# Altium PCB Driver_motor.PcbDoc
Units mm, origin at the board's own origin, x right, y up, seen from the top; angles counter-clockwise.
Board outline 69.34 x 68.83 mm, 2 copper layers (Top Layer, Bottom Layer); 39 components, 38 nets, 169 pads, 26 vias.
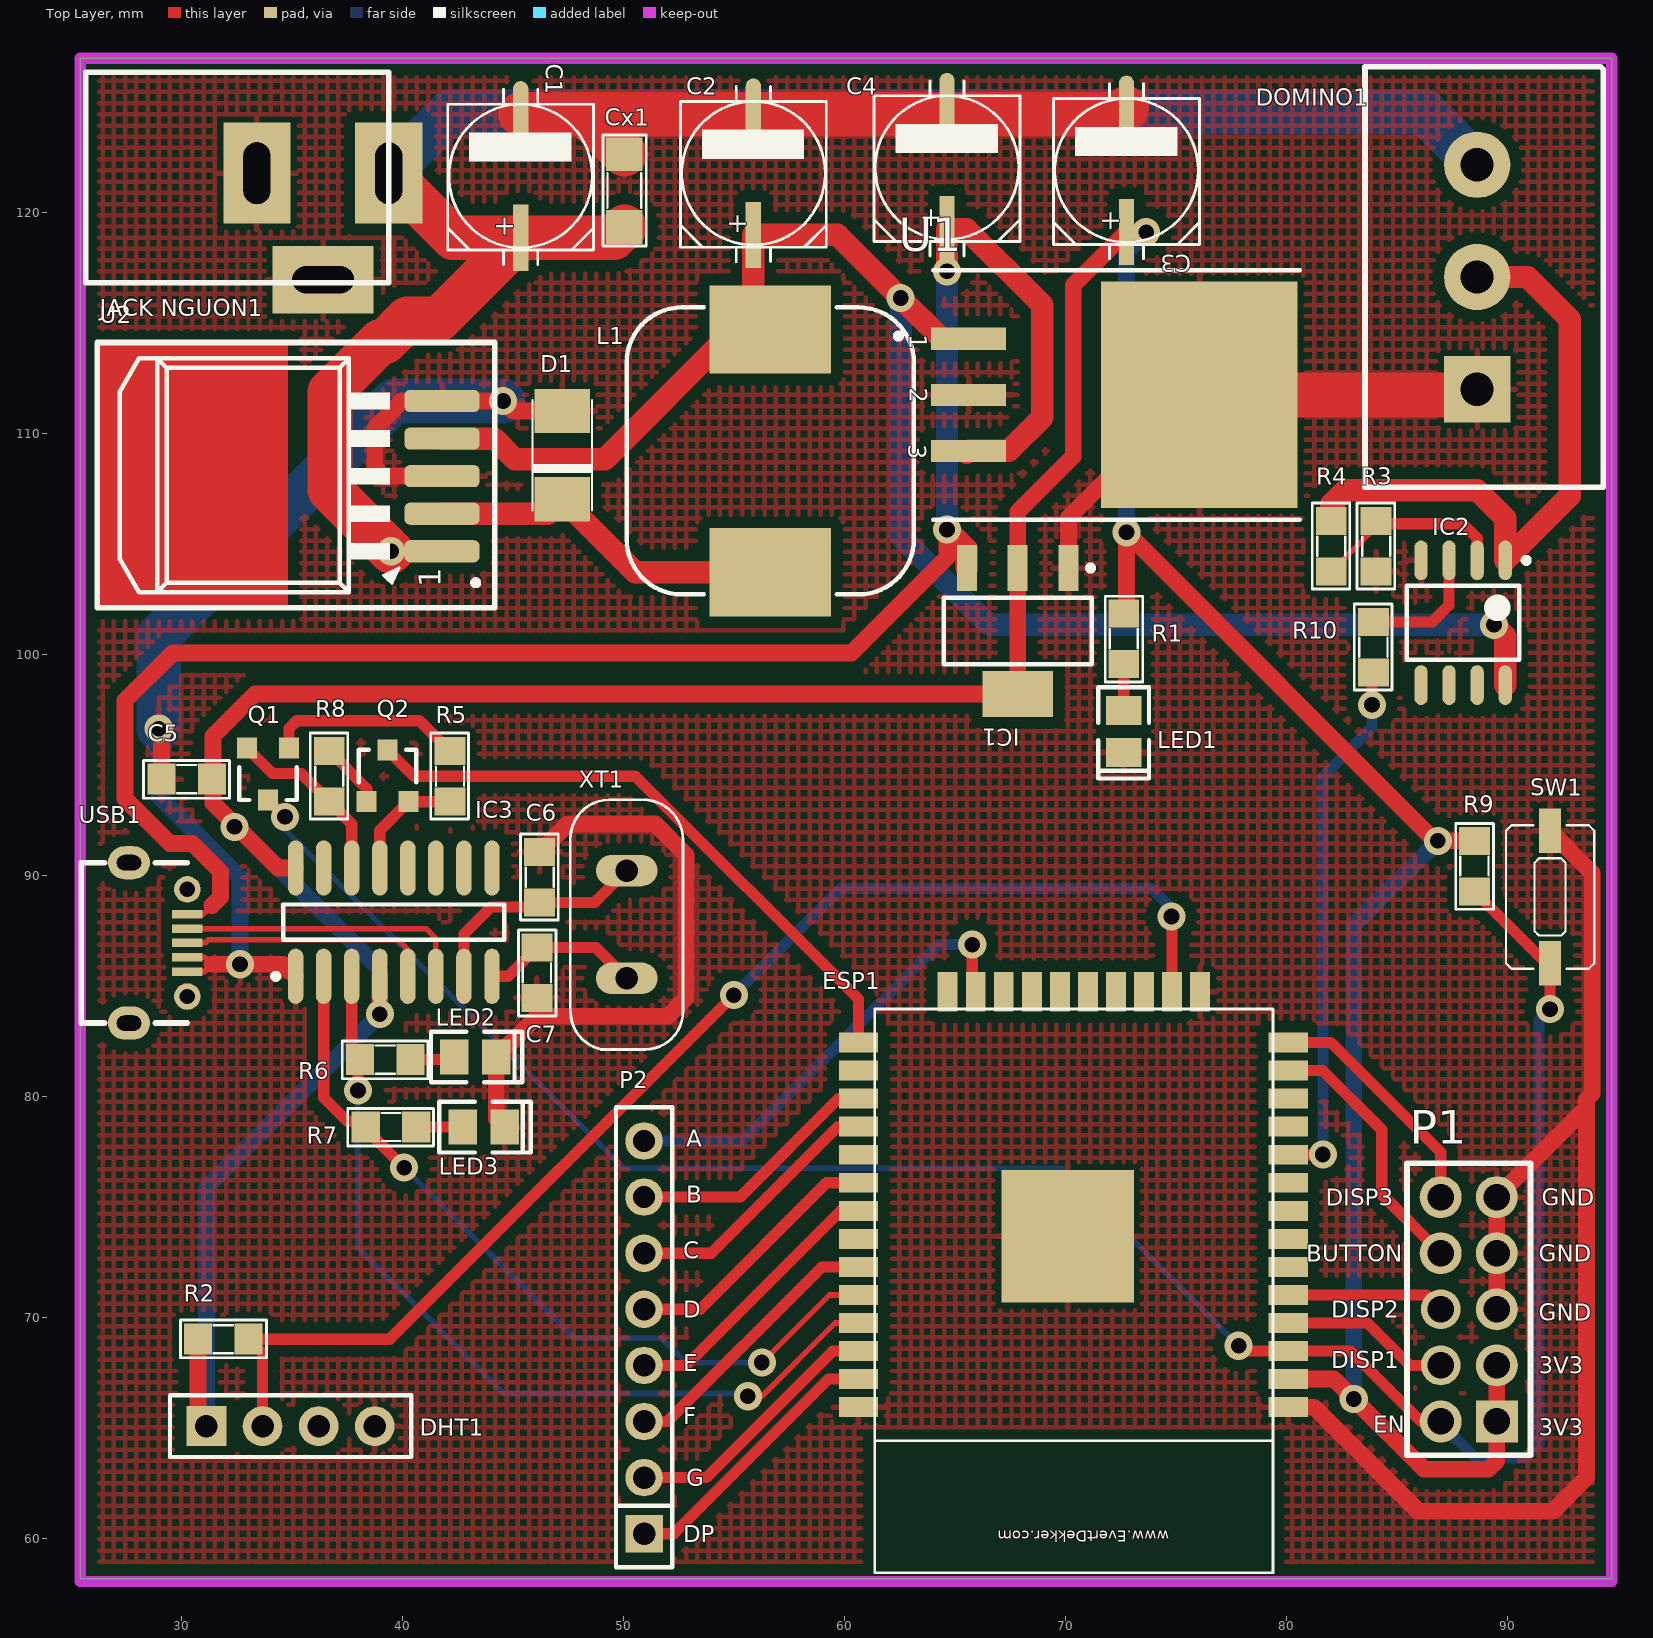
[diagram p0: Top Layer view]
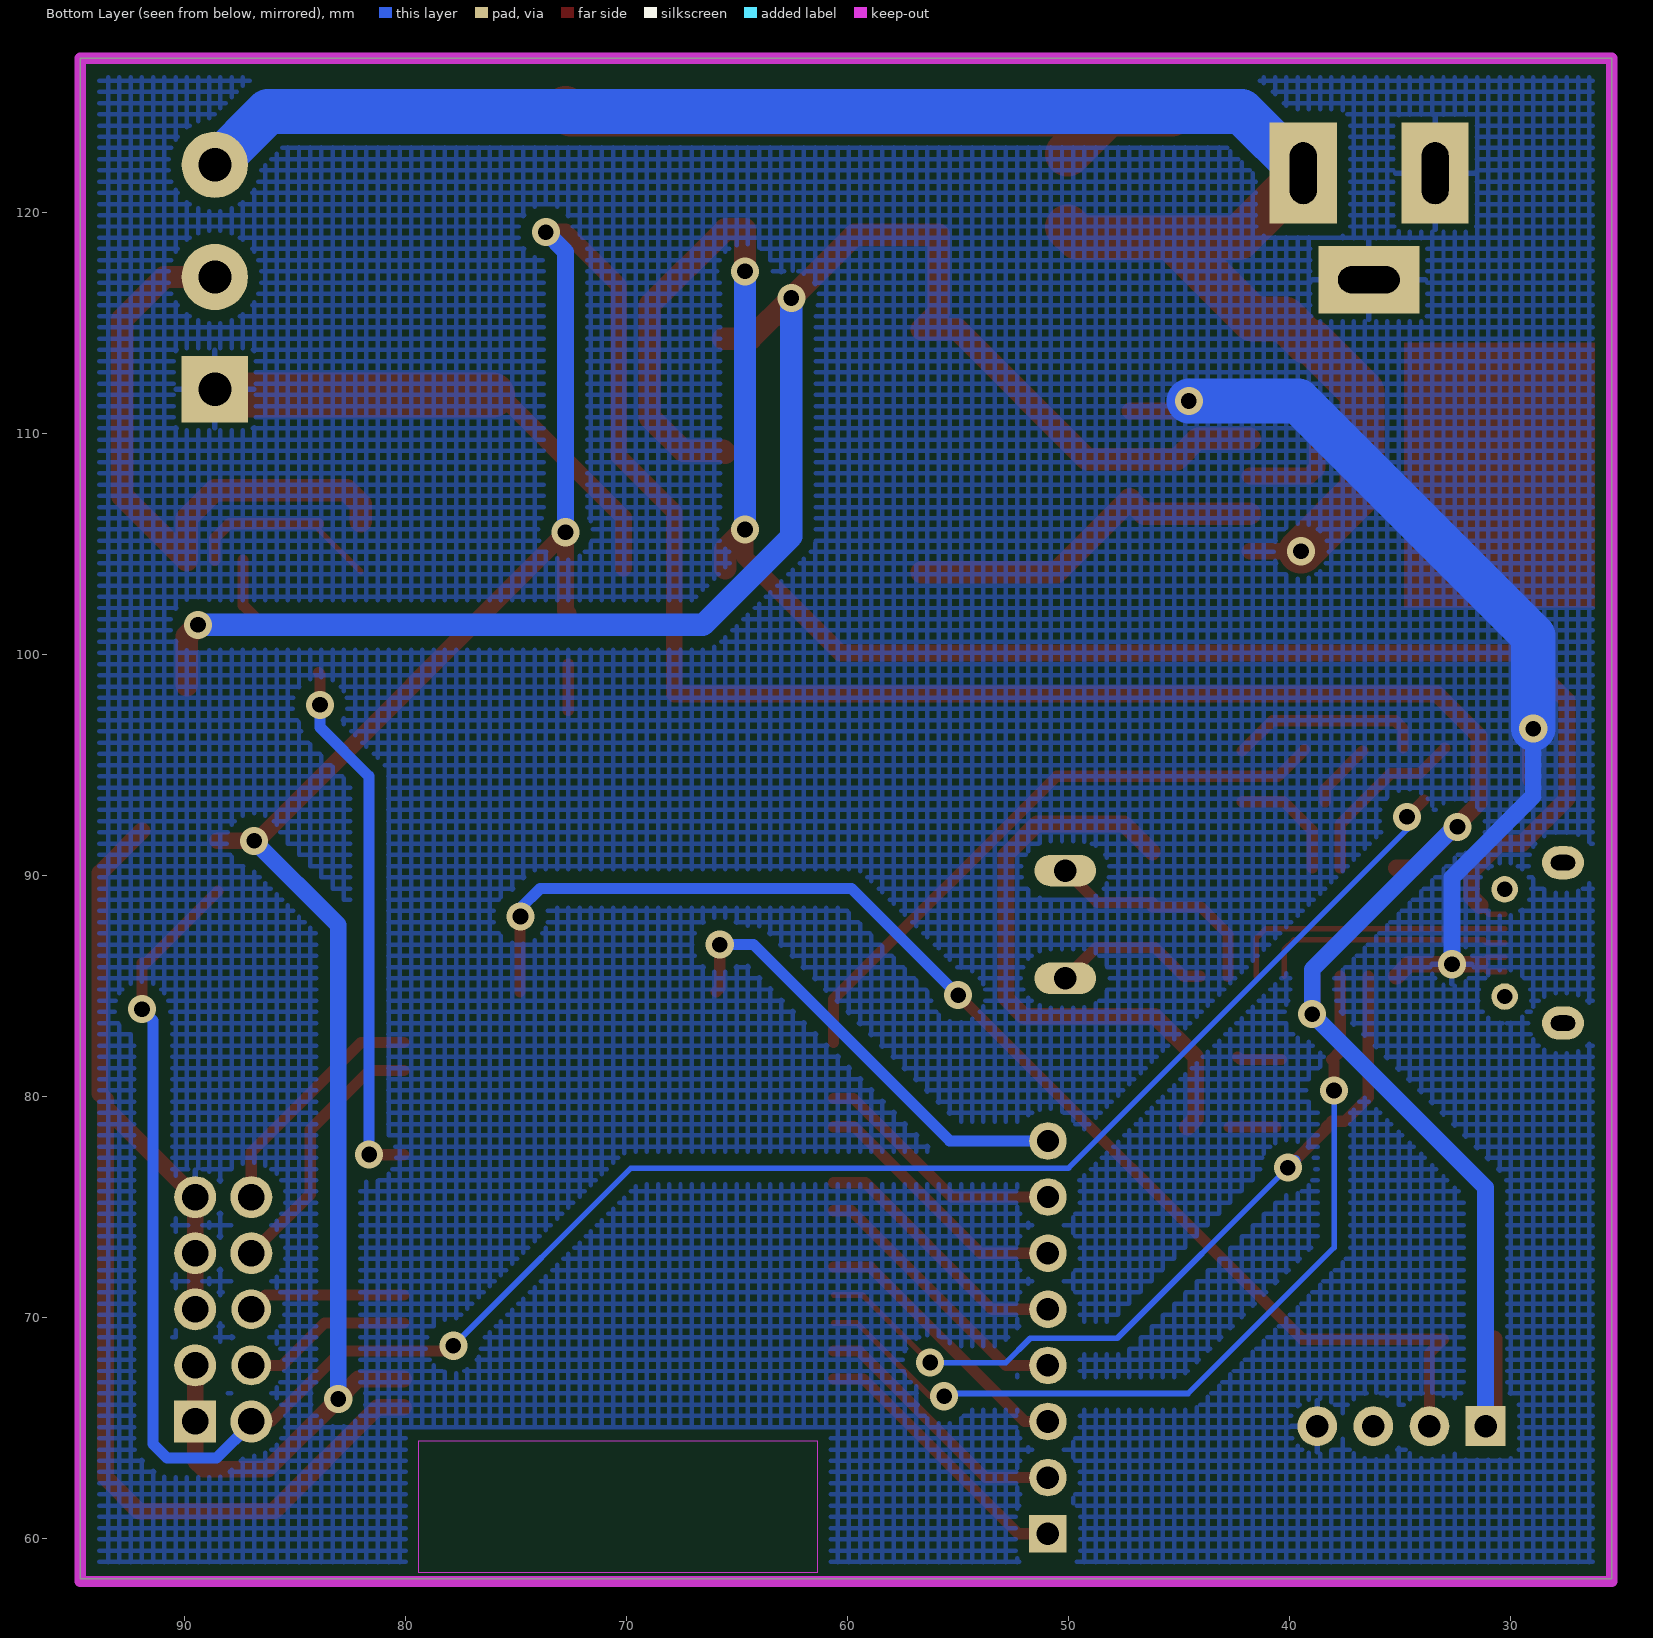
[diagram p1: Bottom Layer view, seen from below]
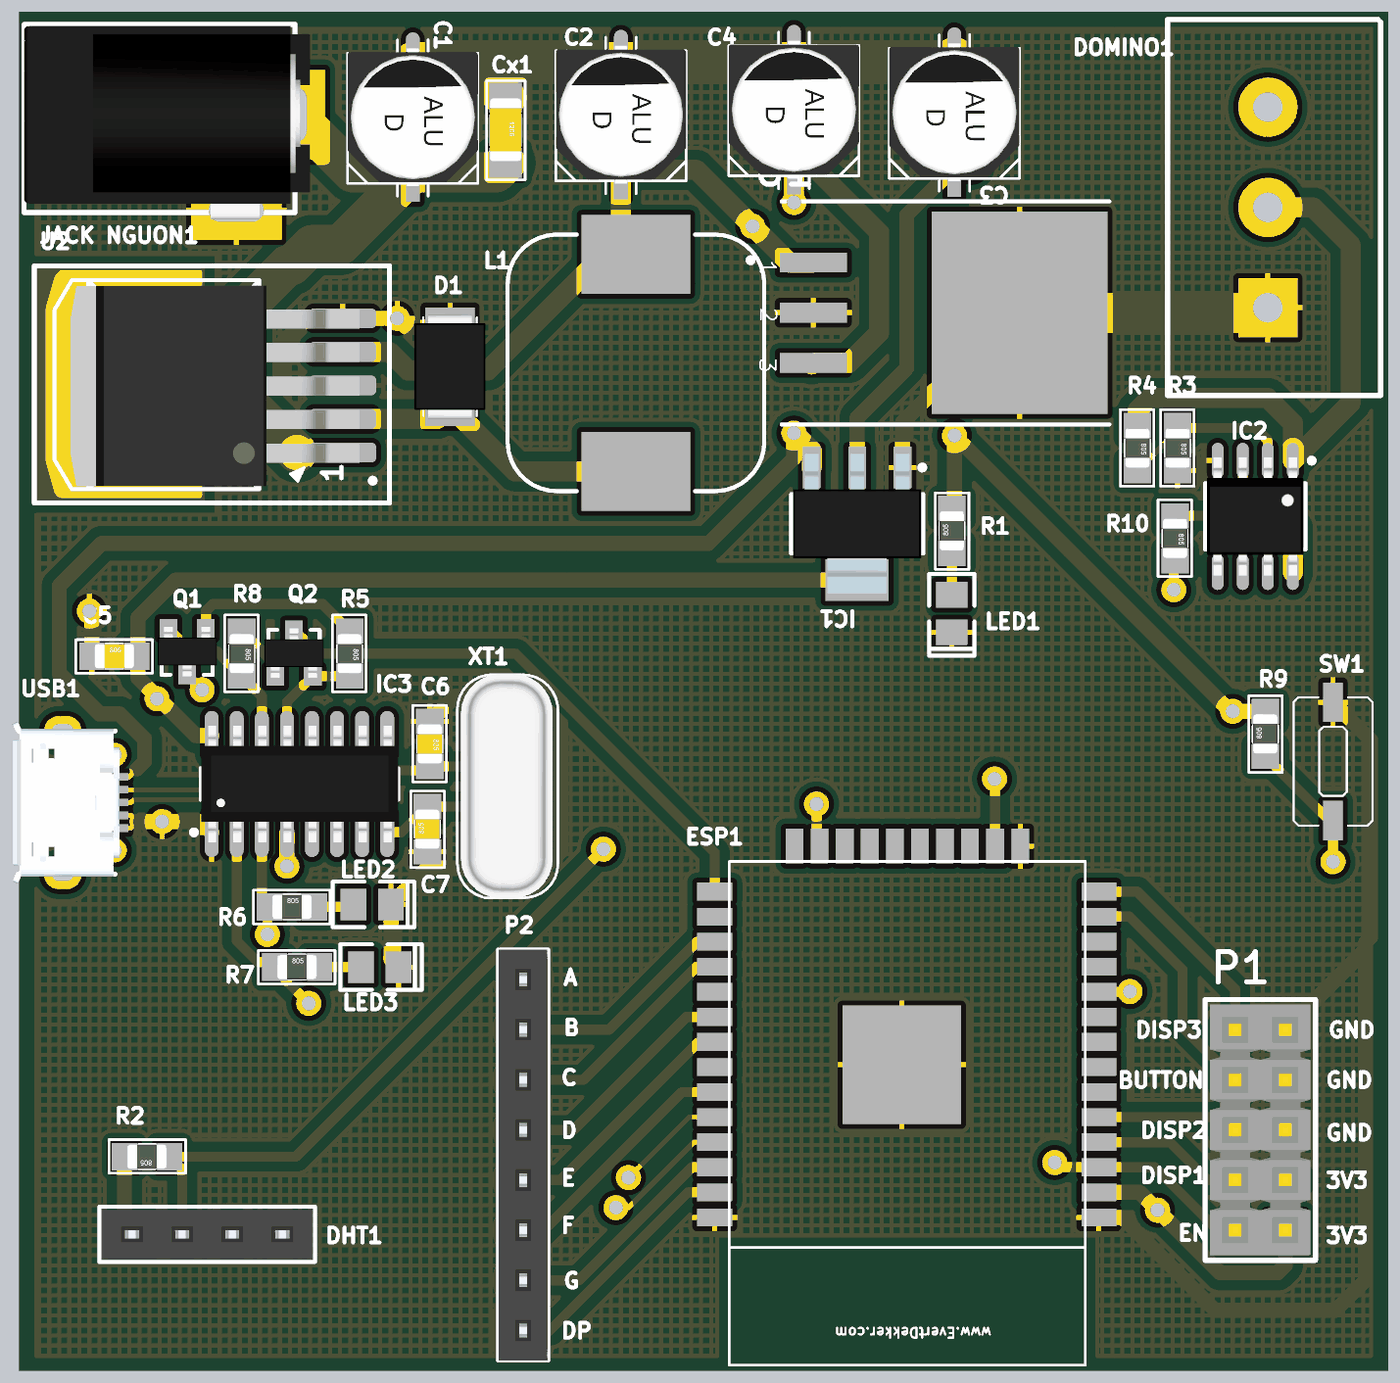
[diagram p2: 3D render of the assembled board from above, using the file's embedded part models]

## Layer stack, top to bottom
Top Solder: solder mask 0.0102, Solder Resist, Dk 3.5
Top Layer: signal copper 0.0356
Dielectric 1: dielectric 0.32, FR-4, Dk 4.8
Bottom Layer: signal copper 0.0356
Bottom Solder: solder mask 0.0102, Solder Resist, Dk 3.5

## Board outline
25.4,58.166 94.742,58.166 94.742,127 25.4,127

## Design rules (kind name [scope] priority, off if disabled: settings)
Clearance Clearance_1 [All vs InPolygon] p1: gap=0.508 ignorepadtopadclearanceinfootprint=FALSE
Clearance [All] p2: gap=0.254 ignorepadtopadclearanceinfootprint=FALSE
PolygonConnect [All] p1: connectstyle=Relief reliefconductorwidth=0.254 reliefentries=4 polygonreliefangle="90 Angle" airgapwidth=0.254
RoutingVias [All] p1: holewidth=0.711 width=1.27 viastyle="Through Hole" minholewidth=0.711 minwidth=1.27 maxholewidth=0.711 maxwidth=1.27
SolderMaskExpansion SolderMaskExpansion_1 [IsVia] p1: expansion=-0.762
SolderMaskExpansion [All] p2: expansion=0.254
Width Width_1 [InNet('GND','24V','10V','3V3','5v')] p1: maxlimit=2.032 minlimit=0.254 preferedwidth=0.762 impedancedriven=TRUE minimp=50.000000 maximp=50.000000 favimp=50.000000
Width [All] p2: maxlimit=1.016 minlimit=0.254 preferedwidth=0.508
30 further rules are at their usual default settings.

## Components (designator, comment, footprint, x,y, rotation, side; value= is the part's Value field where it differs from the comment)
C1 "100uF" CAP-ALU-SMD-D 45.339,121.666 r90 top
C2 "100uF" CAP-ALU-SMD-D 55.88,121.793 r90 top
C3 "100uF" CAP-ALU-SMD-D 72.771,121.92 r90 top
C4 "100uF" CAP-ALU-SMD-D 64.643,122.047 r90 top
C5 "22pF" SM-CAP-0805 29.083,94.361 r0 top value=0,1uF/300V
C6 "22pF" SM-CAP-0805 46.203,91.059 r270 top value=0,1uF/300V
C7 "22pF" SM-CAP-0805 46.076,84.455 r90 top value=0,1uF/300V
Cx1 "100nF" CN-SMD-1206 50.038,121.031 r270 top value=33pF
D1 "SS34" DIOT 47.244,108.204 r180 top
DHT1 "DHT22" DHT22 34.925,65.069 r0 top
DOMINO1 "DOMINO 3S" "DOMINO 3S" 88.646,112.014 r90 top
ESP1 "ESP32S_Module" ESP32 75.889,70.495 r180 top
IC1 "LM1117-3V3" LM1117-3V3-5V 68.326,100.076 r270 top value=LM317
IC2 "LM358" SO8 88.011,101.442 r270 top
IC3 "CH340" "ch340 g" 39.599,87.757 r180 top
"JACK NGUON1" "PS" "jack nguon" 33.909,120.396 r0 top
L1 "100uH" "cuon cam" 56.642,109.22 r90 top value=33uH
LED1 "HSMH-C170" LED 72.644,96.774 r90 top
LED2 "HSMH-C170" LED.SMD.GREEN 43.282,81.788 r180 top
LED3 "HSMH-C170" LED.SMD.GREEN 43.663,78.613 r180 top
P1 "Header 5x2" "Header 5x2" 89.535,65.278 r90 top
P2 "JP8" JP8-C1T 50.927,60.198 r90 top
Q1 "MMBT3904" "MMBT 3904" 33.884,94.107 r180 top
Q2 "MMBT3904" "MMBT 3904" 39.345,94.996 r0 top
R1 "1k" SM-RES-0805 72.644,99.568 r90 top value="R1/4W - 1K"
R2 "10k" SM-RES-0805 33.02,69.006 r180 top value="R1/4W - 1K"
R3 "1k" SM-RES-0805 84.074,106.045 r270 top value="R1/4W - 1K"
R4 "3k3" SM-RES-0805 82.042,106.045 r270 top value="R1/4W - 1K"
R5 "10k" SM-RES-0805 42.139,95.631 r270 top value="R1/4W - 1K"
R6 "300" SM-RES-0805 38.075,81.661 r0 top value="R1/4W - 1K"
R7 "300" SM-RES-0805 38.329,78.613 r0 top value="R1/4W - 1K"
R8 "10k" SM-RES-0805 36.678,95.631 r270 top value="R1/4W - 1K"
R9 "10k" SM-RES-0805 88.519,89.281 r90 top value="R1/4W - 1K"
R10 "300" SM-RES-0805 83.947,101.473 r270 top value="R1/4W - 1K"
SW1 "PTS635" "BUTTON SMD 2PIN" 91.948,89.027 r270 top
U1 "LM78xx" TO-263 65.614,114.294 r270 top value=LM7805CT
U2 "LM2976-3V3" TO263 35.814,107.696 r90 top
USB1 "USB_M" "micro usb" 27.813,87.757 r270 top
XT1 "Crystal2" Crystal.HC49_N 50.14,85.344 r180 top value=12MHz

## Footprints (in the part's own frame and the unit in brackets; to place one, negate y for a bottom-side part, rotate by r counter-clockwise, add the part's x,y. Pads: shape width x height; smd on the part's side, far side on the other; paste and mask are expansions set on the pad)
"BUTTON SMD 2PIN" [mil] "3,5 mm Tact Switches, PTS635 Series"
  rect 79x39 smd: 1(-118,0) 2(118,0)
  silkscreen extent -128,-79 128,79, body extent -135,-70 135,70, height 100
CAP-ALU-SMD-D [mm]
  rect 3x0.7 smd: 1(-2.794,0)
  oval 3x0.7 smd: 2(2.794,0)
  silkscreen extent -4,-3.3 3.93,3.3, body extent -3.5,-3.3 3.5,3.3, height 5.4
"ch340 g" [mm]
  oval 0.7x2.5 smd: 1(4.445,2.323) 2(3.175,2.323) 3(1.905,2.323) 4(0.635,2.323) 5(-0.635,2.323) 6(-1.905,2.323) 7(-3.175,2.323) 8(-4.445,2.323) 9(-4.445,-2.577) 10(-3.175,-2.577) 11(-1.905,-2.577) 12(-0.635,-2.577) 13(0.635,-2.577) 14(1.905,-2.577) 15(3.175,-2.577) 16(4.445,-2.577)
  silkscreen extent -5,-0.93 5.47,2.45, body extent -5,-3.09 4.98,2.82, height 1.45
CN-SMD-1206 [mil]
  rect 60x65 smd: 1(-64,0) 2(66,0)
  silkscreen extent -98,-38 100,39, body extent -63,-31 63,32, height 40
Crystal.HC49_N [mil] "HC49USxx package"
  rrect100% 110x56 hole 40: 1(0,0) 2(0,-192)
  silkscreen extent -100,-318 100,127, body extent -90,-319 93,127, height 157
"cuon cam" [mm]
  rect 4x5.5 smd: 1(-5.5,0) 2(5.5,0)
  silkscreen extent -6.5,-6.5 6.5,6.5
DHT22 [mm]
  rect 1.8x1.8 hole 1.02: 1(-3.81,0)
  round 1.8 hole 1.02: 2(-1.27,0) 3(1.27,0) 4(3.81,0)
  silkscreen extent -5.46,-1.4 5.46,1.4, body extent -7.86,-5.84 7.61,2.31, height 35.57
DIOT [mm]
  rect 2.5x2 smd: 1(0.019,-2.824) 2(0.019,1.176)
  silkscreen extent -1.33,-3.32 1.42,1.68, body extent -1.78,-3.47 1.82,1.83, height 2.45
"DOMINO 3S" [mm] "3 terminal 5.04 spacing"
  rect 3x3 hole 1.5: 1(0,0)
  round 3 hole 1.5: 2(5.08,0) 3(10.16,0)
  silkscreen extent -4.44,-5.71 14.6,5.08
ESP32 [mm]
  rect 1.778x0.9 smd: 1(-4.201,4.569) 2(-4.201,3.299) 3(-4.201,2.029) 4(-4.201,0.759) 5(-4.201,-0.511) 6(-4.201,-1.781) 7(-4.201,-3.051) 8(-4.201,-4.321) 9(-4.201,-5.591) 10(-4.201,-6.861) 11(-4.201,-8.131) 12(-4.201,-9.401) 13(-4.201,-10.671) 14(-4.201,-11.941) 25(15.256,-11.941) 26(15.256,-10.671) 27(15.256,-9.401) 28(15.256,-8.131) 29(15.256,-6.861) 30(15.256,-5.591) 31(15.256,-4.321) 32(15.256,-3.051) 33(15.256,-1.781) 34(15.256,-0.511) 35(15.256,0.759) 36(15.256,2.029) 37(15.256,3.299) 38(15.256,4.569)
  rect 0.9x1.778 smd: 15(-0.215,-14.244) 16(1.055,-14.244) 17(2.325,-14.244) 18(3.595,-14.244) 19(4.865,-14.244) 20(6.135,-14.244) 21(7.405,-14.244) 22(8.675,-14.244) 23(9.945,-14.244) 24(11.215,-14.244)
  rect 6x6 smd: 101(5.785,-3.165)
  Keep-Out Layer region: -3.515,6.093 14.519,6.093 14.519,12.062 -3.515,12.062
  silkscreen extent -3.51,-13.46 14.52,12.06, body extent -3.51,-13.46 14.52,12.06, height 2
"Header 5x2" [mm] "Connector; Header; 10 Position; 2 Rows; Solder Pad 35mil"
  rect 1.9x1.9 hole 1.2: 1(0,0)
  round 1.9 hole 1.2: 2(0,2.54) 3(2.54,0) 5(5.08,0) 7(7.62,0) 8(7.62,2.54) 9(10.16,0) 10(10.16,2.54)
  round 1.8 hole 1.2: 4(2.54,2.54) 6(5.08,2.54)
  silkscreen extent -1.52,-1.52 11.68,4.06, body extent -1.27,-1.27 11.43,3.81, height 2.11
"jack nguon" [mil]
  rect 120x180 hole 48 slot 110 at 90 deg: 1(-20,55) 2(215,55)
  rect 180x120 hole 48 slot 110 at 0 deg: 3(98,-135)
  silkscreen extent -325,-140 215,235, body extent -325,-154 245,232, height 433
JP8-C1T [mm] "8 row, straight, gold plating"
  rect 1.7x1.7 hole 1.02: 1(0,0)
  round 1.7 hole 1.02: 2(2.54,0) 3(5.08,0) 4(7.62,0) 5(10.16,0) 6(12.7,0)
  round 1.7 hole 1: 7(15.24,0) 8(17.78,0)
  silkscreen extent -1.52,-1.27 19.3,1.27, body extent -1.52,-1.25 19.3,1.25, height 8.51
LED [mm]
  rect 1.3x1.6 smd: 1(0.694,0.006) 2(-1.206,0.006)
  silkscreen extent -2.39,-1.14 1.74,1.16, body extent -1.33,-0.64 0.83,0.64, height 1.14
LED.SMD.GREEN [mm]
  rect 1.3x1.6 smd: 1(0.948,0.006) 2(-0.952,0.006)
  silkscreen extent -2.13,-1.14 2,1.16, body extent -1.08,-0.64 1.08,0.64, height 1.14
LM1117-3V3-5V [mm]
  rect 2.1x0.9 smd: 1(-3.841,1.817) 2(-3.841,-0.483) 3(-3.841,-2.783)
  rect 2.1x3.2 smd: 2(1.859,-0.483)
  silkscreen extent -3.97,-3.83 0.51,2.94, body extent -4.53,-3.73 2.55,2.77, height 1.65
"micro usb" [mil]
  rect 15x54 smd: 1(-19,96) 2(6.5,96) 3(32,96) 4(57.5,96) 5(83,96)
  oval 59.06x74.8 hole 27.56 slot 43.31 at 90 deg: 6(175,-8) 7(-111,-8)
  round 47.24 hole 27.5: 8(-63.5,96) 9(127.5,96)
  silkscreen extent -111,-93 175,96, body extent -129,-108 193,105, height 105
"MMBT 3904" [mm]
  rect 0.9x0.95 smd: 1(-0.975,-1.658) 2(0.925,-1.658) 3(-0.025,0.692)
  silkscreen extent -1.33,-0.78 1.27,0.69, body extent -1.53,-1.73 1.47,0.77, height 1.08
SM-CAP-0805 [mil]
  rect 50x55 smd: 1(0,0) 2(90,0)
  silkscreen extent -32,-34 121,33, body extent 6,-25 84,25, height 31
SM-RES-0805 [mil]
  rect 50x55 smd: 1(0,0) 2(90,0)
  silkscreen extent -32,-34 121,33, body extent 6,-25 84,25, height 31
SO8 [mm] "SOIC, 8-Leads, Body 4.9x3.9mm, Pitch 1.27mm, IPC High Density"
  oval 1.8x0.6 smd: 1(-2.825,1.905) 2(-2.825,0.635) 3(-2.825,-0.635) 4(-2.825,-1.905) 5(2.825,-1.905) 6(2.825,-0.635) 7(2.825,0.635) 8(2.825,1.905)
  silkscreen extent -2.95,-2.55 1.68,2.98, body extent -2.99,-2.45 3,2.45, height 1.6
TO263 [mm]
  rrect50% 1x3.4 smd: 1(-3.019,-5.969) 2(-1.319,-5.969) 4(2.081,-5.969) 5(3.781,-5.969)
  rrect50% 1x3.4 smd mask+0: 3(0.381,-5.969)
  Top Layer region: -5.568,1.016 6.432,1.016 6.432,9.65 -5.568,9.65
  silkscreen extent -5.57,-8.35 6.43,9.65, body extent -4.73,-6.84 5.43,7.8, height 4.57
TO-263 [mm]
  rect 1x3.4 smd: 1(-0.006,0.009) 2(2.534,0.009) 3(5.074,0.009)
  rect 10.25x8.9 smd: 2(2.534,10.459)
  silkscreen extent -3.11,-3.29 8.19,15.01, body extent -2.46,-1.15 7.54,14.21, height 4.5

## Part data
C1 C2 C3 C4: library part CN-ALU-SMD, "Polarized Capacitor (Axial)", LatestRevisionDate=17-Jul-2002, LatestRevisionNote="Re-released for DXP Platform.", PackageReference=POLAR0.8, Published=8-Jun-2000, Publisher="Altium Limited"
C5 C6 C7: library part CN, "0,1uF/300V", Designed by=VanDungEvn
Cx1: library part CN
D1: library part "Diode 1N4007", "1 Amp General Purpose Rectifier", Code_JEDEC=DO-204-AL, ComponentLink1Description="Manufacturer Link", ComponentLink1URL=http://www.fairchildsemi.com/, ComponentLink2Description=Datasheet, ComponentLink2URL=http://www.fairchildsemi.com/ds/1N%2F1N4001.pdf, DatasheetVersion=1998, LatestRevisionDate=17-Jul-2002, LatestRevisionNote="Re-released for DXP Platform.", PackageDescription="Diode, Axial; Body 5.2 x 2.7 mm (LxDia. max), Lead Dia. 0.86 mm (max)", PackageReference=DO-41, PackageVersion=Aug-1999, Published=8-Jun-2000, Publisher="Altium Limited"
DHT1: Manufacturer="Würth Elektronik eiSos GmbH", partNo=613004143121, ComponentLink1 Description=Manufacturer, ComponentLink1URL=http://www.we-online.com, ComponentLink2 Description=Datasheet, ComponentLink2URL=http://katalog.we-online.de/em/datasheet/6130xx143121.pdf, Created by="Karrer Zheng", Created Date="29 March 2013", NoPins=04
ESP1: "Esp-32S", Datasheet=https://espressif.com/sites/default/files/documentation/esp_wroom_32_datasheet_en.pdf
IC1: library part LM1117, "3v3"
IC2: "Low-Power Dual Operational Amplifier"
"JACK NGUON1": library part JACK_DC, "DC Power Jack, 2.5mm, KLD Series, PCB Mount", ComponentLink1Description="Digikey Part link", ComponentLink2Description="Open DataSheet", ComponentLink2URL=H:\LIBRARY\LIBRARY.Datasheet\, Price=1.500VND, Vendor="Nhat Tao"
L1: library part "Inductor Ferrite", "Cuon Cam L", Code_IEC=1005, Code_JEITA=0402, ComponentLink1Description="Digikey Part Link", ComponentLink2Description="Open Datasheet", ComponentLink2URL=H:\LIBRARY\LIBRARY.Datasheet\, LatestRevisionDate=17-Jul-2002, LatestRevisionNote="Re-released for DXP Platform.", PackageReference=0402-A, Published=8-Jun-2000, Publisher="Altium Limited", Vendor=Digikey
LED1 LED2 LED3: library part LED_1, "Typical GaAs SMD LED", Color=RED, Manufacturer="Lite-On Inc", ComponentLink1Description="Digikey Part Link", ComponentLink2Description="Open Datasheet", ComponentLink2URL=H:\LIBRARY\LIBRARY.Datasheet\, Published=13-April-2009, Publisher="Hoang Nguyen", Type="Cong ty RP", Vendor=Digikey
P1: "Header, 10-Pin, 2-Row", LatestRevisionDate=17-Jul-2002, LatestRevisionNote="Re-released for DXP Platform.", Publisher="Altium Limited"
P2: "WR-PHD 2.54 mm Angled Socket Header", Manufacturer="Würth Elektronik eiSos GmbH", partNo=613008143121, ComponentLink1 Description=Manufacturer, ComponentLink1URL=http://www.we-online.com, ComponentLink2 Description=Datasheet, ComponentLink2URL=http://katalog.we-online.de/em/datasheet/6130xx143121.pdf, Created by="Karrer Zheng", Created Date="29 March 2013", NoPins=08
R1 R2 R3 R4 R5 R6 R7 R8 R9 R10: library part R_1, "Resistor 1/4W"
SW1: library part "BUTTON SMD 2PIN", "BUTTON SMD 2PIN", Manufacturer="C&K Components", Manufacturer P/N="PTS635SL25SMTR LFS", ComponentLink1Description="Digikey Part Link", ComponentLink1URL=http://search.digikey.com/scripts/DkSearch/dksus.dll?Detail&name=CKN1573CT-ND, ComponentLink2Description="Open Datasheet", ComponentLink2URL=H:\LIBRARY\LIBRARY.Datasheet\SBLCDA4_Specification.pdf, Published=13-April-2009, Publisher="Hoang Nguyen", Vendor=Digikey, Vendor P/N=CKN9119CT-ND
U1: "Regulator", Manufacturer="Fairchild Semiconductor Corporation", Output Current="Up to 1A", PSpiceTemplate="X^@REFDES %IN %OUT %GND @MODEL", Tolerance="4 %", ComponentLink1Description="Digikey Part Link", ComponentLink2Description="Open Datasheet", ComponentLink2URL=H:\LIBRARY\LIBRARY.Datasheet\LM7805.pdf, Price="2500 VND", Published=13-April-2009, Publisher="Hoang Nguyen", Vendor=Digikey, V out=5V
U2: library part LM2596, Max Input Voltage="12 V", Max Output Current="3 (6.0 peak) A", Max Output Voltage=mV, Temperature Range="-40 to +125 degC", Category=IC-Power, Min Input Voltage=mV, Min Output Voltage=mV, Mounting Technology="Surface Mount", Status=Unreleased, Supply Voltage=mV
XT1: "Quarz Crystal", ComponentLink1Description="Digikey Part Link", ComponentLink2Description="Open Datasheet", ComponentLink2URL=H:\LIBRARY\LIBRARY.Datasheet\, Price="2000 VND", Published=13-April-2009, Publisher="Hoang Nguyen", Vendor=Digikey

## Via types
v1: diameter 1.27, hole 0.711, Top Layer to Bottom Layer, 26 vias

## Nets (pads, with @x,y where several pads share a name; then routed paths per layer and width w, separated by ;. In a path a pad name is that pad's centre, name@x,y a point inside that pad or via, vN(x,y) a via of type N, cw(c..) or ccw(c..) an arc to the next point about the centre after c; other vN are vias at no path point)
3V3: C3.1 C5.2 DHT1.1 ESP1.2 IC1.2 IC3.4 IC3.16 P1.1 P1.3 R1.2 R2.2 R9.2 | length 189.7
  Top Layer w0.762: R2.2 30.734,65.45 DHT1.1 ; IC3.16 34.355,90.334 31.415,93.274 31.415,96.312 33.32,98.217 67.843,98.217 67.843,103.917 67.843,106.451 70.358,108.966 70.358,116.713 C3.1 v1(73.66,119.126) ; v1(38.964,83.718) IC3.4 ; R1.2 72.771,101.981 v1(72.771,105.537) 86.741,91.567 v1(86.868,91.567) R9.2 ; ESP1.2 82.156,67.196 v1(83.058,66.294) 86.233,63.119 89.154,63.119 89.535,63.5 P1.1 P1.3
  Bottom Layer w0.762: DHT1.1 31.115,75.87 v1(38.964,83.718) 38.964,85.75 32.512,92.202 v1(32.385,92.202) ; v1(72.771,105.537) 72.771,118.237 v1(73.66,119.126) ; v1(83.058,66.294) 83.058,87.757 v1(86.868,91.567)
5V: C4.1 IC1.3 U1.3 USB1.1 | length 84.9
  Top Layer w0.254: USB1.1 30.963,88.24 31.369,88.646
  Top Layer w0.762: 31.369,88.646 31.75,89.027 31.75,90.17 30.48,91.44 29.464,91.44 27.432,93.472 27.432,97.917 29.591,100.076 60.325,100.076 64.643,104.394 v1(64.643,105.664)
  Top Layer w1.016: v1(64.643,105.664) 65.543,104.764 IC1.3 ; v1(64.643,117.348) C4.1 65.532,119.253 68.961,115.824 68.961,110.744 67.437,109.22 U1.3 U1.3@65.543,109.14
  Bottom Layer w1.016: v1(64.643,105.664) v1(64.643,117.348)
12V: C2.1 IC2.8 L1.2 U1.1 U2.4 | length 76.2
  Top Layer w1.016: U2.4 44.147,109.777 45.085,108.839 49.149,108.839 55.03,114.72 L1.2 55.88,115.482 C2.1 59.69,118.999 v1(62.547,116.141) 64.389,114.3 U1.1 ; v1(89.408,101.346) 89.916,100.838 IC2.8
  Bottom Layer w1.016: v1(62.547,116.141) 62.547,105.346 66.548,101.346 v1(89.408,101.346)
24V: "JACK NGUON1.2" C1.1 Cx1.2 DOMINO1.3 U2.1 | length 85.7
  Top Layer w0.762: v1(39.468,104.677) U2.1
  Top Layer w2.032: 39.37,121.793 42.291,118.872 C1.1 ; v1(39.468,104.677) 36.703,107.442 36.703,111.887 38.989,114.173 39.21,114.173 40.226,115.189 41.656,115.189 C1.1 ; Cx1.2 49.555,118.872 C1.1
  Bottom Layer w2.032: 39.37,121.793 42.164,124.587 86.233,124.587 DOMINO1.3
A: ESP1.23 P2.8 | length 20.7
  Top Layer w0.508: v1(65.786,86.868) 65.786,84.897 ESP1.23
  Bottom Layer w0.508: P2.8 55.372,77.978 64.262,86.868 v1(65.786,86.868)
ADC: IC2.3 R10.1 | length 5.8
  Top Layer w0.508: R10.1 86.614,101.473 87.376,102.235 IC2.3
B: ESP1.27 P2.7 | length 11.6
  Top Layer w0.508: P2.7 55.283,75.438 59.741,79.896 ESP1.27
BUTTON: ESP1.13 P1.8 | length 12
  Top Layer w0.508: ESP1.13 81.648,81.166 84.328,78.486 84.328,75.565 P1.8
C: ESP1.28 P2.6 | length 12.1
  Top Layer w0.508: P2.6 53.975,72.898 59.703,78.626 ESP1.28
CONTROL: DOMINO1.2 IC2.1 R4.1 | length 28.4
  Top Layer w1.016: R4.1 82.042,106.807 82.677,107.442 88.646,107.442 89.916,106.172 IC2.1 92.837,107.188 92.837,115.189 90.932,117.094 DOMINO1.2
D: ESP1.30 P2.5 | length 12.1
  Top Layer w0.508: P2.5 53.467,70.358 59.195,76.086 ESP1.30
DHT22: DHT1.2 ESP1.16 R2.1 | length 58.6
  Top Layer w0.508: DHT1.2 33.655,68.371 R2.1 39.415,69.006 v1(54.991,84.582) ; v1(74.803,88.138) 74.834,88.107 ESP1.16
  Bottom Layer w0.508: v1(54.991,84.582) 59.817,89.408 73.914,89.408 74.803,88.519 v1(74.803,88.138)
DISP1: ESP1.4 P1.4 | length 7.7
  Top Layer w0.508: ESP1.4 83.68,69.736 85.598,67.818 P1.4
DISP2: ESP1.5 P1.6 | length 7.2
  Top Layer w0.508: ESP1.5 86.347,71.006 P1.6
DISP3: ESP1.14 P1.10 | length 11
  Top Layer w0.508: ESP1.14 82.029,82.436 86.995,77.47 P1.10
DP: ESP1.37 P2.1 | length 12.6
  Top Layer w0.508: P2.1 52.286,60.198 59.284,67.196 ESP1.37
DTR: IC3.13 Q2.2 R5.2 | length 5.4
  Top Layer w0.508: IC3.13 38.964,92.033 Q2.2 42.132,93.338 R5.2
E: ESP1.31 P2.4 | length 12.6
  Top Layer w0.508: P2.4 52.832,67.818 59.83,74.816 ESP1.31
EN: ESP1.3 P1.2 Q1.3 R9.1 SW1.2 | length 97.3
  Top Layer w0.508: Q1.3 v1(34.671,92.653) ; v1(77.851,68.707) 78.092,68.466 ESP1.3 82.918,68.466 86.106,65.278 P1.2 ; R9.1 91.77,86.03 SW1.2 v1(91.948,83.947)
  Bottom Layer w0.254: v1(34.671,92.653) 34.671,92.075 49.999,76.747 69.811,76.747 v1(77.851,68.707)
  Bottom Layer w0.508: P1.2 86.995,65.2 88.568,63.627 90.805,63.627 91.44,64.262 91.44,83.439 v1(91.948,83.947)
F: ESP1.33 P2.3 | length 12.6
  Top Layer w0.508: P2.3 51.978,65.278 58.976,72.276 ESP1.33
G: ESP1.36 P2.2 | length 12.1
  Top Layer w0.508: P2.2 53.748,62.738 59.476,68.466 ESP1.36
GND: "JACK NGUON1.1" "JACK NGUON1.3" C1.2 C2.2 C3.2 C4.2 C5.1 C6.1 C7.1 Cx1.1 D1.1 DHT1.4 DOMINO1.1 ESP1.1 ESP1.15 ESP1.38 ESP1.101 IC1.1 IC2.4 IC3.1 LED1.2 LED2.2 LED3.2 P1.5 P1.7 P1.9 R3.2 SW1.1 U1.2 U2.3 U2.5 USB1.4 USB1.5 | length 197
  Top Layer w0.254: USB1.5 31.039,85.649 31.369,85.979 31.051,86.296 USB1.4
  Top Layer w0.762: v1(28.956,96.647) 29.083,96.52 C5.1 ; 31.369,85.979 v1(32.639,85.979) 34.609,85.979 IC3.1 ; U2.3 39.116,108.077 38.735,108.458 38.735,110.236 39.976,111.477 U2.5 v1(44.548,111.477) 44.997,111.028 D1.1 ; LED3.2 44.234,78.988 LED2.2 46.076,83.624 52.001,83.624 52.832,84.455 52.832,90.932 51.435,92.329 47.473,92.329 C6.1 ; IC1.1 70.143,106.211 75.692,111.76 U1.2@76.073,111.76 ; ESP1.1 81.267,65.926 85.979,61.214 92.075,61.214 93.599,62.738 93.599,79.502 ; P1.5 P1.7 P1.9 93.599,79.502 ; SW1.1 93.853,90.119 93.853,80.119 93.599,79.865 93.599,79.502
  Top Layer w2.032: C1.2 48.235,124.46 ; Cx1.1 48.235,124.46 ; C3.2 72.517,124.46 48.235,124.46 ; U1.2@76.073,111.76 88.392,111.76 DOMINO1.1
  Bottom Layer w0.762: v1(28.956,96.647) 28.956,93.599 32.639,89.916 v1(32.639,85.979)
  Bottom Layer w2.032: v1(28.956,96.647) 28.956,100.838 39.595,111.477 v1(44.548,111.477)
GPIO_0: ESP1.25 Q2.3 | length 28
  Top Layer w0.508: Q2.3 40.52,94.488 50.546,94.488 60.633,84.401 ESP1.25
NetC6_2: C6.2 IC3.7 XT1.2 | length 10.6
  Top Layer w0.508: IC3.7 42.774,87.351 43.999,88.576 46.203,88.576 C6.2 48.692,88.773 XT1.2
NetC7_2: C7.2 IC3.8 XT1.1 | length 7.2
  Top Layer w0.508: IC3.8 44.769,85.434 C7.2 48.743,86.741 XT1.1
NetD1_2: D1.2 L1.1 U2.2 | length 16.5
  Top Layer w1.016: U2.2 46.574,106.377 D1.2 50.533,103.72 L1.1
NetESP1_10: ESP1.10 R10.2 | length 24.3
  Top Layer w0.508: ESP1.10 81.648,77.356 v1(81.661,77.369) ; v1(83.883,97.727) 83.883,99.123 R10.2
  Bottom Layer w0.508: v1(81.661,77.369) 81.661,94.488 83.883,96.71 v1(83.883,97.727)
NetIC2_2: IC2.2 R3.1 R4.2 | length 8.9
  Top Layer w0.254: R4.2 83.947,105.664 R3.1@83.947,105.918
  Top Layer w0.508: R3.1@83.947,105.918 88.011,105.918 88.646,105.283 IC2.2
NetIC3_5: IC3.5 USB1.3 | length 11.4
  Top Layer w0.254: USB1.3 31.064,86.944 31.204,87.084 39.789,87.084 40.234,86.639 IC3.5
NetIC3_6: IC3.6 USB1.2 | length 13.1
  Top Layer w0.254: USB1.2 41.059,87.592 41.504,87.147 IC3.6
NetLED1_1: LED1.1 R1.1 | length 2.1
  Top Layer w0.508: LED1.1 72.644,97.473 R1.1
NetLED2_1: LED2.1 R6.2 | length 2
  Top Layer w0.508: R6.2 42.213,81.661 LED2.1
NetLED3_1: LED3.1 R7.2 | length 2.1
  Top Layer w0.508: R7.2 42.709,78.613 LED3.1
NetQ1_1: Q1.1 R5.1 | length 8.9
  Top Layer w0.508: Q1.1 34.859,96.657 35.204,97.003 40.767,97.003 R5.1
NetQ2_1: Q2.1 R8.1 | length 3
  Top Layer w0.508: R8.1 38.369,93.939 Q2.1
RTS: IC3.14 Q1.2 R8.2 | length 8.2
  Top Layer w0.508: Q1.2 34.109,94.615 35.408,94.615 R8.2 37.694,92.329 IC3.14
RXD: ESP1.34 IC3.2 R7.1 | length 36.4
  Top Layer w0.254: v1(56.261,67.945) 59.322,71.006 ESP1.34
  Top Layer w0.508: IC3.2 36.424,79.943 37.5,78.867 38.075,78.867 R7.1 38.329,78.511 v1(40.069,76.772)
  Bottom Layer w0.254: v1(40.069,76.772) 47.791,69.049 51.728,69.049 52.832,67.945 v1(56.261,67.945)
  Bottom Layer w0.508: v1@39.751,77.089 v1(40.069,76.772)
TXD: ESP1.35 IC3.3 R6.1 | length 39.5
  Top Layer w0.254: v1(55.626,66.421) 56.261,66.421 59.576,69.736 ESP1.35
  Top Layer w0.508: IC3.3 37.694,82.042 R6.1 37.973,81.559 v1(37.973,80.264)
  Bottom Layer w0.254: v1(37.973,80.264) 37.973,73.152 44.579,66.546 v1@55.501,66.546
  Bottom Layer w0.508: v1(37.973,80.264) v1@38.1,80.137 ; v1@55.501,66.546 v1(55.626,66.421)
pads on no net: DHT1.3 ESP1.6 ESP1.7 ESP1.8 ESP1.9 ESP1.11 ESP1.12 ESP1.17 ESP1.18 ESP1.19 ESP1.20 ESP1.21 ESP1.22 ESP1.24 ESP1.26 ESP1.29 ESP1.32 IC2.5 IC2.6 IC2.7 IC3.9 IC3.10 IC3.11 IC3.12 IC3.15 USB1.6 USB1.7 USB1.8 USB1.9

## Polygon pours and split planes (outlines as drawn)
GND on Bottom Layer "Top Overlay-No Net" (hatched 90Degree grid 0.508 track 0.203, pour order 2): 25.4,127 25.4,58.166 94.742,58.166 94.742,127
GND on Top Layer "Top Overlay-No Net" (hatched 90Degree grid 0.508 track 0.203, pour order 0): 25.4,127 94.742,127 94.742,58.166 25.4,58.166

## Keep-outs
Keep-Out Layer:
  lines w0.508: 25.4,58.039 94.742,58.039 94.742,127 25.4,127 25.4,58.039

## Silkscreen, mask and mechanical layers (free items; w line width, h text height)
Top Overlay:
  text "A" at 52.832,77.724 h0.76
  text "B" at 52.832,75.184 h0.76
  text "DISP3" at 81.788,75.057 h0.76
  text "GND" at 91.567,75.057 h0.76
  text "C" at 52.705,72.644 h0.76
  text "BUTTON" at 80.899,72.517 h0.76
  text "GND" at 91.44,72.517 h0.76
  text "D" at 52.705,69.977 h0.76
  text "DISP2" at 82.042,69.977 h0.76
  text "GND" at 91.44,69.85 h0.76
  text "DISP1" at 82.042,67.691 h0.76
  text "E" at 52.705,67.564 h0.76
  text "3V3" at 91.44,67.437 h0.76
  text "F" at 52.705,65.151 h0.76
  text "EN" at 83.947,64.77 h0.76
  text "3V3" at 91.44,64.643 h0.76
  text "G" at 52.832,62.357 h0.76
  text "DP" at 52.705,59.817 h0.76

## Text inside footprints (layer, text, board x,y; h text height)
C1: Top Overlay "+" at 45.014,118.866 h0.89 r90
C2: Top Overlay "+" at 55.555,118.993 h0.89 r90
C3: Top Overlay "+" at 72.446,119.12 h0.89 r90
C4: Top Overlay "+" at 64.318,119.247 h0.89 r90
ESP1: Top Overlay "www.EvertDekker.com" at 74.705,60.338 h0.5 r180
U1: Top Overlay "1" at 62.948,114.495 h0.8 r270; Top Overlay "3" at 62.923,109.52 h0.8 r270; Top Overlay "2" at 62.961,112.082 h0.8 r270
U2: Top Overlay "1" at 41.732,103.051 h1 r90